# Altium PCB mix V4(3.8).PcbDoc
Units mm, origin at the board's own origin, x right, y up, seen from the top; angles counter-clockwise.
Board outline 54 x 54 mm, 2 copper layers (Top Layer, Top, Bottom Layer, Bottom); 45 components, 30 nets, 130 pads, 27 vias.
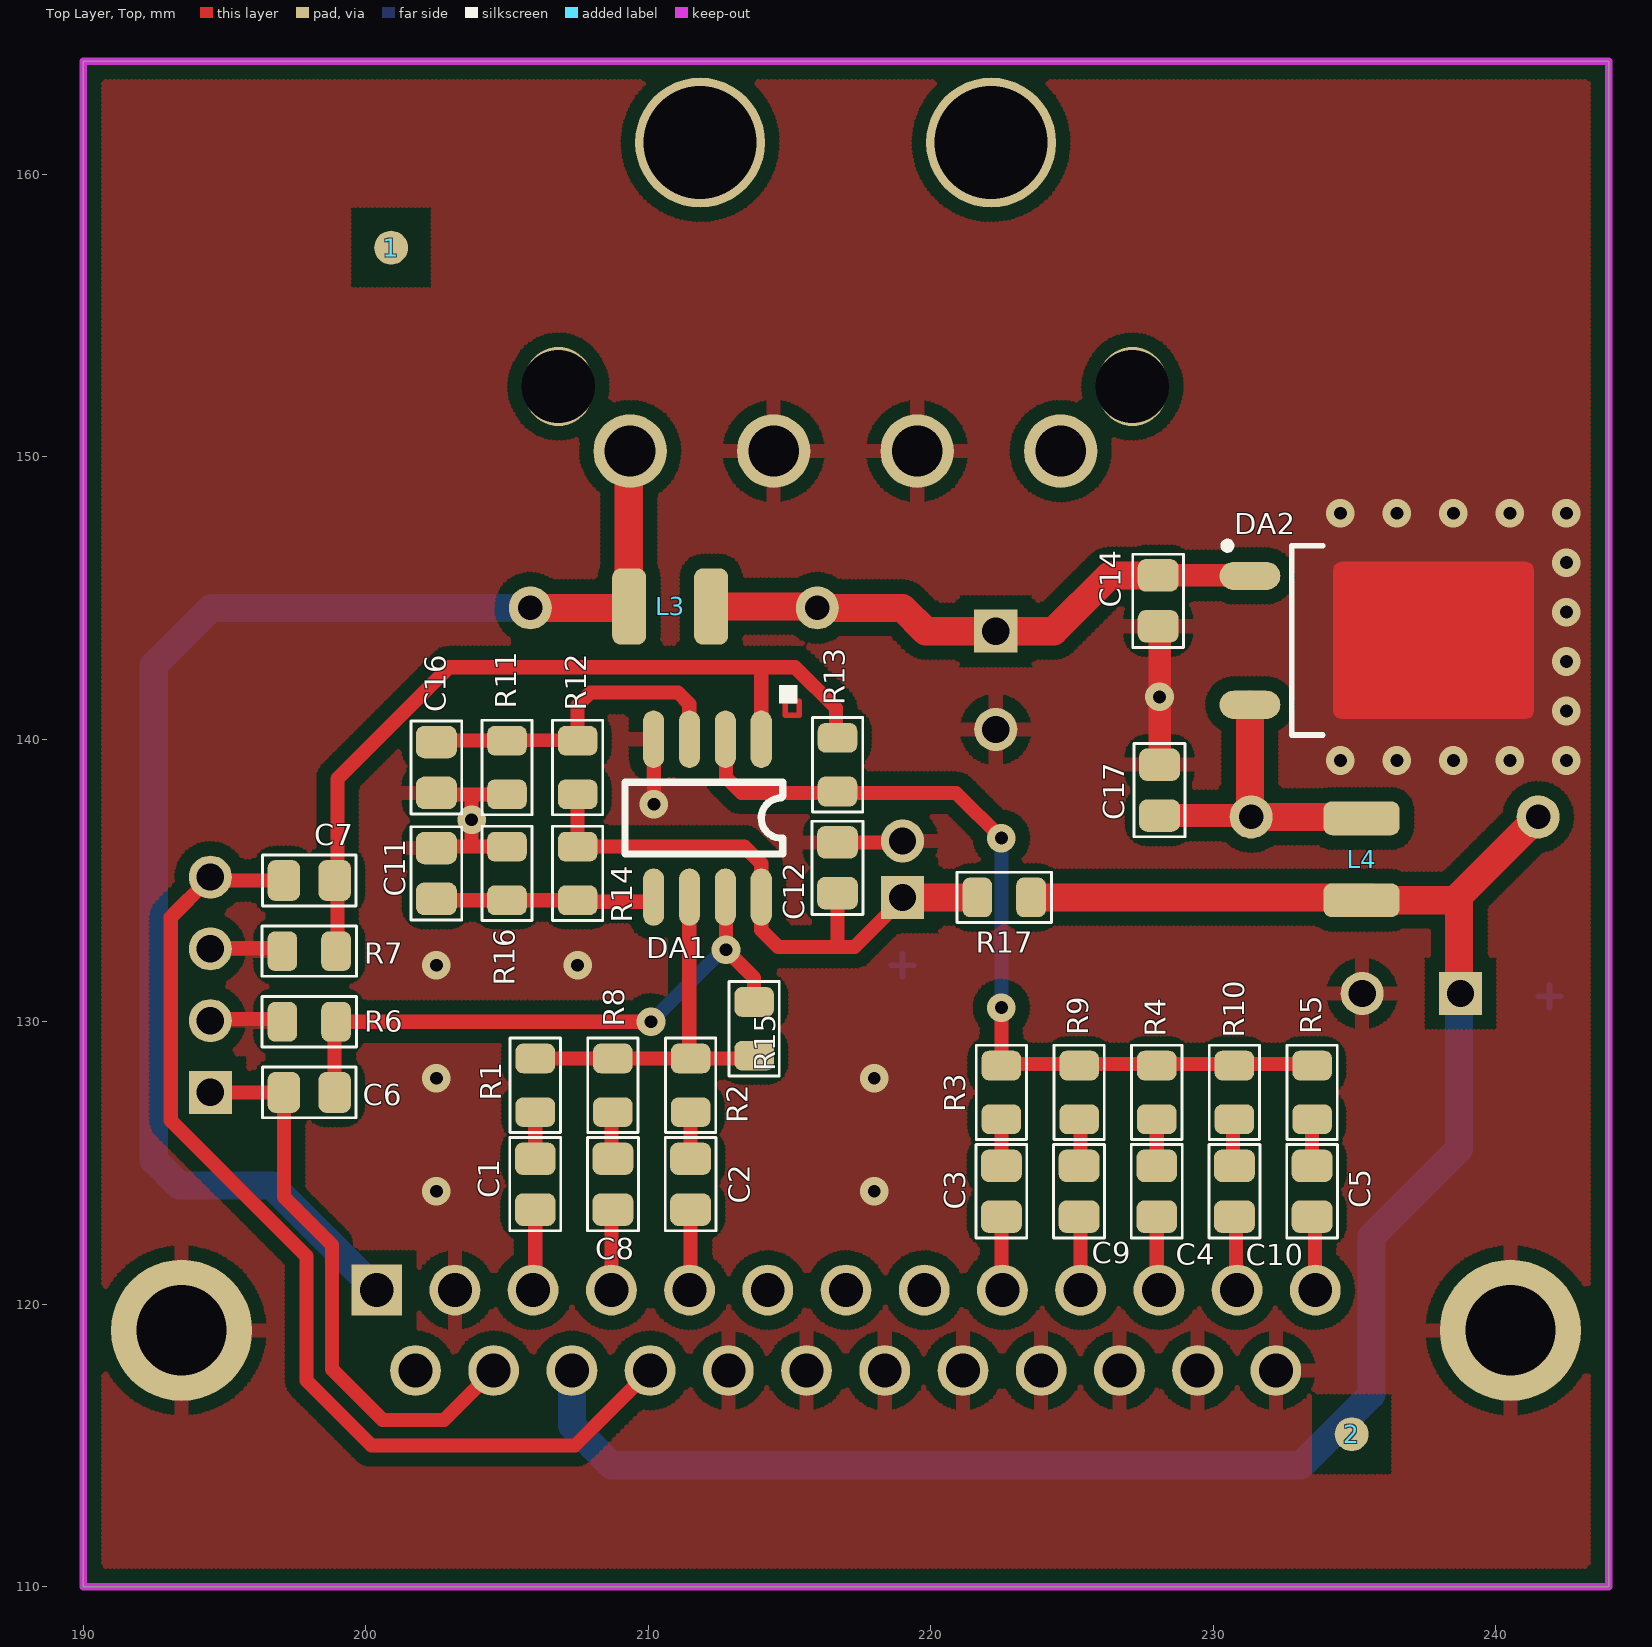
[diagram p0: Top Layer, Top view]
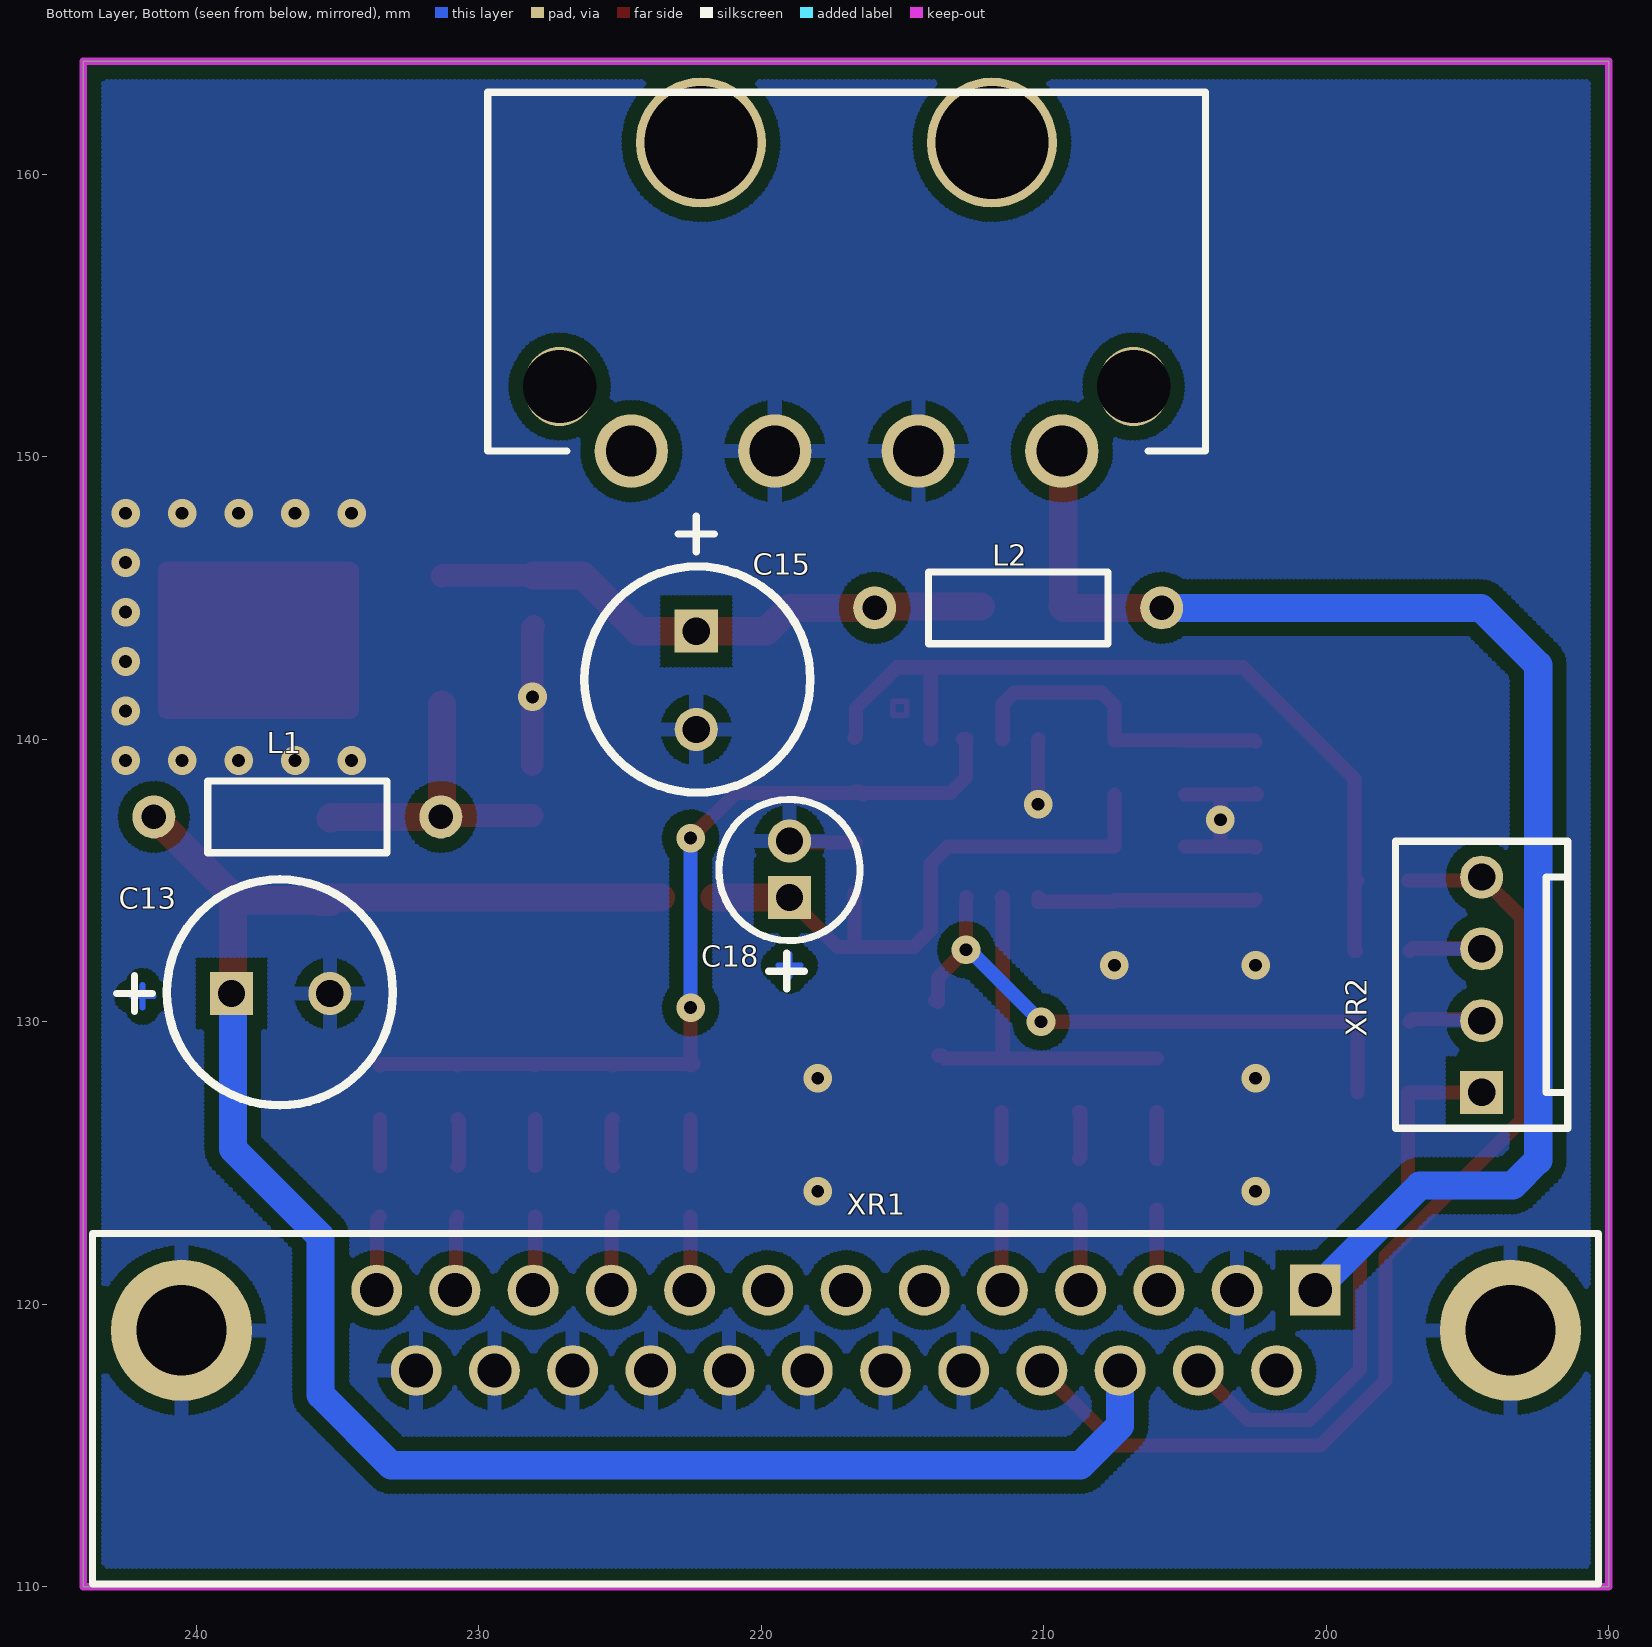
[diagram p1: Bottom Layer, Bottom view, seen from below]

## Layer stack, top to bottom
Top Solder, Top Mask: solder mask 0.0102, Solder Resist, Dk 3.5
Top Layer, Top: signal copper 0.0356
Dielectric 1: dielectric 0.32, FR-4, Dk 4.8
Bottom Layer, Bottom: signal copper 0.0356
Bottom Solder, Bot Mask: solder mask 0.0102, Solder Resist, Dk 3.5

## Board outline
190,110 244,110 244,164 190,164

## Design rules (kind name [scope] priority, off if disabled: settings)
Clearance [All] p1: gap=0.5
PlaneClearance [All] p1: clearance=0.254
PolygonConnect PolygonConnect_1 [IsVia] p1: connectstyle=Direct reliefconductorwidth=0.254 reliefentries=4 polygonreliefangle="90 Angle" airgapwidth=0.254
PolygonConnect [All] p2: connectstyle=Relief reliefconductorwidth=0.5 reliefentries=4 polygonreliefangle="90 Angle" airgapwidth=0.5
RoutingVias [All] p1: holewidth=0.711 width=1.27 viastyle="Through Hole" minholewidth=0.711 minwidth=1.27 maxholewidth=0.711 maxwidth=1.27
SolderMaskExpansion [All] p1: expansion=0.102
Width [All] p1: maxlimit=3 minlimit=0.2 preferedwidth=0.5
29 further rules are at their usual default settings.

## Components (designator, comment, footprint, x,y, rotation, side; value= is the part's Value field where it differs from the comment)
1 "{Value}" REPER1.2 200.9,157.4 r0 top
2 "{Value}" REPER1.2 234.9,115.4 r0 top
C1 "0.1uF" CC0805_2 206,124.25 r90 top
C2 "0.1uF" CC0805_2 211.5,124.25 r90 top
C3 "0.1uF" CC0805_2 222.5,124 r90 top
C4 "0.1uF" CC0805_2 228,124 r90 top
C5 "0.1uF" CC0805_2 233.5,124 r90 top
C6 "0.1uF" CC0805_2 198,127.5 r0 top
C7 "0.1uF" CC0805_2 198,135 r0 top
C8 "0.1uF" CC0805_2 208.75,124.25 r90 top
C9 "0.1uF" CC0805_2 225.25,124 r90 top
C10 "0.1uF" CC0805_2 230.75,124 r90 top
C11 "1uF" CC0805_2 202.5,135.25 r270 top
C12 "0.1uF" CC0805_2 216.7,135.45 r270 top
C13 "220uFx16V" CC8X11 238.75,131 r180 bottom
C14 "0.1uF" CC0805_2 228.05,144.9 r90 top
C15 "470uFx25V" CC8X11 222.3,143.825 r270 bottom
C16 "1uF" CC0805_2 202.5,139 r90 top
C17 "0.1uF" CC0805_2 228.1,138.2 r270 top
C18 "10uFx16V" CC4X8 219,134.4 r90 bottom
DA1 "" SO-8 214,140 r270 top
DA2 "" D-PAK(TO-252AA) 235.8,143.5 r0 top
L1 "10uH" IND400 241.5,137.25 r180 bottom
L2 "10uH" IND400 205.825,144.65 r0 bottom
L3 "10 uH" L1210_ISO 210.775,144.7 r180 top
L4 "10 uH" L1210_ISO 235.25,135.75 r90 top
R1 "12k" RC0805_2_R0805(RESC2012X70N) 206,127.75 r270 top
R2 "12k" RC0805_2_R0805(RESC2012X70N) 211.5,127.75 r270 top
R3 "12k" RC0805_2_R0805(RESC2012X70N) 222.5,127.5 r270 top
R4 "12k" RC0805_2_R0805(RESC2012X70N) 228,127.5 r270 top
R5 "12k" RC0805_2_R0805(RESC2012X70N) 233.5,127.5 r270 top
R6 "2k7" RC0805_2_R0805(RESC2012X70N) 198,130 r0 top
R7 "2k7" RC0805_2_R0805(RESC2012X70N) 198,132.5 r0 top
R8 "12k" RC0805_2_R0805(RESC2012X70N) 208.75,127.75 r270 top
R9 "12k" RC0805_2_R0805(RESC2012X70N) 225.25,127.5 r270 top
R10 "12k" RC0805_2_R0805(RESC2012X70N) 230.75,127.5 r270 top
R11 "12k" RC0805_2_R0805(RESC2012X70N) 205,139 r270 top
R12 "12k" RC0805_2_R0805(RESC2012X70N) 207.5,139 r90 top
R13 "12k" RC0805_2_R0805(RESC2012X70N) 216.7,139.1 r270 top
R14 "12k" RC0805_2_R0805(RESC2012X70N) 207.5,135.25 r270 top
R15 "12k" RC0805_2_R0805(RESC2012X70N) 213.75,129.75 r270 top
R16 "12k" RC0805_2_R0805(RESC2012X70N) 205,135.25 r90 top
R17 "10" RC0805_2_R0805(RESC2012X70N) 222.6,134.4 r180 top
XR1 "" DB25F 200.388,120.5 r0 bottom
XR2 "" PIN4W 194.5,127.5 r90 bottom

## Footprints (in the part's own frame and the unit in brackets; to place one, negate y for a bottom-side part, rotate by r counter-clockwise, add the part's x,y. Pads: shape width x height; smd on the part's side, far side on the other; paste and mask are expansions set on the pad)
CC4X8 [mil]
  rect 60x60 hole 38: 1(0,0)
  round 60 hole 38: 2(78.74,0)
  silkscreen extent -128,-98 137,98
CC8X11 [mil]
  rect 60x60 hole 38: 1(0,0)
  round 60 hole 38: 2(137,0)
  silkscreen extent -160,-156 225,159
CC0805_2 [mm]
  rrect50% 1.15x1.45 smd: 1(-0.9,0) 2(0.9,0)
  silkscreen extent -1.65,-0.9 1.65,0.9
D-PAK(TO-252AA) [mm]
  oval 2.15x1 smd: 1(-4.5,2.28) 3(-4.5,-2.28)
  round 0 smd paste-25.4 mask-25.4: 2(2,0)
  Top Layer, Top region: -1.55,-2.5 -1.513,-2.638 -1.412,-2.738 -1.275,-2.775 5.275,-2.775 5.413,-2.738 5.513,-2.638 5.55,-2.5 5.55,2.5 5.513,2.638 5.413,2.738 5.275,2.775 -1.275,2.775 -1.412,2.738 -1.513,2.638 -1.55,2.5
  silkscreen extent -5.42,-3.35 -1.92,3.47
DB25F [mm]
  rect 1.8x1.8 hole 1.2: 1(0,0)
  round 1.8 hole 1.2: 2(2.769,0) 3(5.537,0) 4(8.306,0) 5(11.074,0) 6(13.843,0) 7(16.612,0) 8(19.38,0) 9(22.149,0) 10(24.917,0) 11(27.686,0) 12(30.455,0) 13(33.223,0) 14(1.372,2.845) 15(4.14,2.845) 16(6.909,2.845) 17(9.677,2.845) 18(12.446,2.845) 19(15.215,2.845) 20(17.983,2.845) 21(20.752,2.845) 22(23.52,2.845) 23(26.289,2.845) 24(29.058,2.845) 25(31.826,2.845)
  round 5 hole 3.2: 26(40.132,1.422) 27(-6.909,1.422)
  silkscreen extent -10.02,-2 43.28,10.4
IND400 [mil]
  round 60 hole 34: 1(0,0) 2(400,0)
  silkscreen extent 75,-50 325,50
L1210_ISO [mm]
  rrect50% 1.2x2.7 smd: 1(-1.45,0) 2(1.45,0)
PIN4W [mil]
  rect 60x60 hole 38: 1(0,0)
  round 60 hole 38: 2(100,0) 3(200,0) 4(300,0)
  silkscreen extent -50,-120 350,120
RC0805_2_R0805(RESC2012X70N) [mm]
  rrect50% 1.05x1.4 smd: 1(0.95,0) 2(-0.95,0)
  silkscreen extent -1.67,-0.89 1.67,0.89
REPER1.2 [mm]
  round 1.2 smd paste-25.4 mask-25.4: 1(0,0)
SO-8 [mil]
  oval 80x29.53 smd: 1(0,0) 2(0,-50) 3(0,-100) 4(0,-150) 5(220,-150) 6(220,-100) 7(220,-50) 8(220,0)
  silkscreen extent -75,-190 160,50

## Free pads (board coordinates)
  round 2.6 hole 1.8: 1(209.36,150.2) 2(214.44,150.2) 3(219.52,150.2) 4(224.6,150.2)
  round 4.6 hole 4 unplated: 5(222.135,161.12) 6(211.835,161.12)
  oval 2.4x2.8 hole 2.6 unplated: 7(206.82,152.486) 8(227.14,152.486)

## Via types
v1: diameter 1.016, hole 0.457, Top Layer, Top to Bottom Layer, Bottom, 27 vias

## Nets (pads, with @x,y where several pads share a name; then routed paths per layer and width w, separated by ;. In a path a pad name is that pad's centre, name@x,y a point inside that pad or via, vN(x,y) a via of type N, cw(c..) or ccw(c..) an arc to the next point about the centre after c; other vN are vias at no path point)
GND: C11.1 C12.1 C13.2 C14.1 C15.2 C16.1 C17.1 C18.2 DA1.4 DA2.2 pad.2 pad.3 R6.2 R7.2 R11.1 R16.1 XR1.2 XR1.18 XR1.19 XR1.20 XR1.21 XR1.22 XR1.23 XR1.24 XR1.25 XR1.26 XR1.27 XR2.2 XR2.3 | length 21.9
  Top Layer, Top w0.5: XR2.2 194.5,130.1 196.95,130.1 R6.2 ; XR2.3 194.5,132.6 196.95,132.6 R7.2 ; C11.1 202.5,136.2 203.75,136.2 ; C16.1 202.45,138.05 202.55,138.05 203.7,138.05 ; R16.1 203.75,136.2 ; R11.1 203.7,138.05 ; DA1.4 210.2,139.99 v1(210.2,137.7) ; C12.1@216.65,136.35 C12.1 C18.2@219,136.35 ; 203.7,138.05 203.75,138 v1(203.75,137.15) 203.75,136.2
  Top Layer, Top w0.8: C18.2@219,136.35 C18.2 ; C14.1 228.1,143.95 v1(228.1,141.5) C17.1
  other v1: 202.5,124 218,124 202.5,128 218,128 202.5,132 207.5,132 234.5,139.25 236.5,139.25 238.5,139.25 240.5,139.25 242.5,139.25 242.5,141 242.5,142.75 242.5,144.5 242.5,146.25 234.5,148 236.5,148 238.5,148 240.5,148 242.5,148
NET00000: C1.2 R1.1 | length 1.6
  Top Layer, Top w0.5: C1.2 R1.1
NET00001: C1.1 XR1.3 | length 2.9
  Top Layer, Top w0.5: XR1.3 206,120.574 C1.1
NET00002: C2.2 R2.1 | length 1.6
  Top Layer, Top w0.5: C2.2 R2.1
NET00003: C3.2 R3.1 | length 1.7
  Top Layer, Top w0.5: C3.2 R3.1
NET00004: C4.2 R4.1 | length 1.7
  Top Layer, Top w0.5: C4.2 R4.1
NET00005: C5.2 R5.1 | length 1.7
  Top Layer, Top w0.5: C5.2 R5.1
NET00006: C16.2 DA1.3 R11.2 R12.1 | length 11.8
  Top Layer, Top w0.5: C16.2 202.55,139.95 R11.2 R12.1@207.5,139.969 ; R12.1 R12.1@207.5,139.969 ; DA1.3 211.45,140 211.45,141.25 211.05,141.65 207.95,141.65 207.5,141.2 R12.1@207.5,139.969
NET00007: C17.2 DA2.3 L1.2 L4.2 | length 11.3
  Top Layer, Top w0.8: C17.2 231.3,137.3 L1.2
  Top Layer, Top w1: L1.2@231.25,137.25 L1.2 ; DA2.3 231.3,137.3 231.3,137.29 L1.2 ; L4.2 235.2,137.25 L1.2
NET00008: C8.2 R8.1 | length 1.7
  Top Layer, Top w0.5: C8.2 208.7,125.2 208.7,126.8 R8.1
NET00009: C9.2 R9.1 | length 1.7
  Top Layer, Top w0.5: C9.2 225.3,124.95 225.3,126.5 R9.1
NET00010: C10.2 R10.1 | length 1.7
  Top Layer, Top w0.5: C10.2 230.7,124.95 230.7,126.5 R10.1
NET00011: C9.1 XR1.10 | length 2.6
  Top Layer, Top w0.5: C9.1 225.3,123 225.3,120.506 XR1.10
NET00012: C10.1 XR1.12 | length 2.6
  Top Layer, Top w0.5: C10.1 230.8,123 230.8,120.543 XR1.12
NET00013: C8.1 XR1.4 | length 2.9
  Top Layer, Top w0.5: XR1.4 208.7,120.506 208.7,123.2 C8.1
NET00014: C2.1 XR1.5 | length 2.9
  Top Layer, Top w0.5: XR1.5 211.5,120.537 C2.1
NET00015: C13.1 L1.1 L4.1 R17.2 XR1.16 | length 71.5
  Top Layer, Top w1: R17.2 235.3,134.4 L4.1@235.622,134.4 ; C13.1 238.7,131 238.8,131.1 238.7,131.2 238.7,134.3 ; L1.1 238.7,134.45 238.7,134.3 ; L4.1@235.4,134.25 L4.1@235.45,134.3 ; L4.1@235.4,134.25 235.25,134.25 L4.1 L4.1@235.45,134.3 ; L4.1@235.4,134.25 L4.1@235.572,134.25 ; L4.1@235.45,134.3 L4.1@235.522,134.3 ; L4.1@235.522,134.3 235.7,134.3 235.654,134.254 235.65,134.25 L4.1@235.572,134.25 ; L4.1@235.522,134.3 L4.1@235.572,134.25 ; L4.1@235.522,134.3 L4.1@235.622,134.4 ; L4.1@235.622,134.4 235.722,134.3 236.1,134.3 238.7,134.3
  Bottom Layer, Bottom w1: XR1.16 207.3,117.652 207.3,115.7 208.7,114.3 233.1,114.3 235.6,116.8 235.6,122.4 238.7,125.5 C13.1@238.7,131.05 ; C13.1@238.7,131.1 C13.1@238.7,131.05 ; C13.1 C13.1@238.7,131.05
NET00017: C3.1 XR1.9 | length 2.6
  Top Layer, Top w0.5: C3.1 222.5,120.537 XR1.9
NET00018: C4.1 XR1.11 | length 2.6
  Top Layer, Top w0.5: C4.1 228,120.574 XR1.11
NET00019: C5.1 XR1.13 | length 2.6
  Top Layer, Top w0.5: C5.1 233.6,123 233.6,120.512 XR1.13
NET00020: L2.1 L3.2 pad.1 XR1.1 | length 50.5
  Top Layer, Top w1: L2.1 209.275,144.65 L3.2 209.31,144.715 pad.1@209.31,150.2
  Bottom Layer, Bottom w1: XR1.1 196.688,124.2 193.4,124.2 192.5,125.1 192.5,142.625 194.525,144.65 L2.1
NET00021: DA1.2 R3.2 R4.2 R5.2 R9.2 R10.2 R13.1 | length 32
  Top Layer, Top w0.5: DA1.2 212.85,140 212.75,139.9 212.75,138.65 213.3,138.1 216.35,138.1 216.4,138.05 R13.1@216.45,138.1 ; R13.1@216.4,138.1 R13.1@216.45,138.1 ; R13.1 216.5,138.15 R13.1@216.45,138.1 ; v1(222.5,130.5) R3.2@222.5,128.5 ; v1(222.5,136.5) 220.9,138.1 R13.1@216.45,138.1 ; R10.2 R10.2@230.7,128.5 ; R5.2 233.45,128.5 R10.2@230.7,128.5 ; R3.2@222.5,128.5 225.2,128.5 R9.2 225.3,128.5 227.95,128.5 R4.2 228,128.5 R10.2@230.7,128.5 ; R3.2@222.5,128.5 222.4,128.5 R3.2 R3.2@222.5,128.5
  Bottom Layer, Bottom w0.5: v1(222.5,130.5) v1(222.5,136.5)
NET00022: C7.2 DA1.1 R7.1 R13.2 | length 29.7
  Top Layer, Top w0.5: R7.1 199,132.5 199,134.9 C7.2 199,135.1 199,138.6 202.95,142.55 214,142.55 ; DA1.1 214,142.55 ; R13.2 216.65,140.1 216.65,141.1 215.2,142.55 214,142.55
NET00023: DA1.6 R1.2 R2.2 R8.2 R15.1 | length 13.6
  Top Layer, Top w0.5: R1.2 R8.2 R2.2 ; DA1.6 211.5,134.372 211.48,134.352 211.45,134.352 211.45,128.8 211.45,128.75 R2.2 ; R15.1 213.6,128.8 213.5,128.7 R2.2
NET00024: C6.2 DA1.7 R6.1 R15.2 | length 21.6
  Top Layer, Top w0.5: C6.2 198.9,129.95 R6.1 v1(210.1,130) ; DA1.7 212.75,134.2 v1(212.75,132.55) 212.85,132.45 213.75,131.55 R15.2 R15.2@213.85,130.75
  Bottom Layer, Bottom w0.5: v1(210.1,130) 212.55,132.45 212.65,132.55 v1(212.75,132.55)
NET00026: C14.2 C15.1 DA2.1 L2.2 L3.1 | length 20.3
  Top Layer, Top w0.8: C14.2 231.28,145.8 DA2.1
  Top Layer, Top w1: L3.1 215.935,144.7 L2.2 219,144.65 219.825,143.825 C15.1 224.35,143.825 226.325,145.8 C14.2
NET00027: C7.1 XR1.17 XR2.4 | length 40.1
  Top Layer, Top w0.5: XR1.17 207.411,115 200.2,115 197.9,117.3 197.9,121.7 193.1,126.5 193.1,133.7 194.4,135 194.4,135.1 XR2.4@194.5,135 ; XR2.4@194.5,135 XR2.4 194.6,135.02 XR2.4@194.58,135 ; XR2.4@194.5,135 XR2.4@194.58,135 ; XR2.4@194.58,135 C7.1 194.62,135 XR2.4@194.58,135
NET00028: C6.1 XR1.15 XR2.1 | length 20.3
  Top Layer, Top w0.5: XR2.1 C6.1 197.1,123.8 198.8,122.1 198.8,117.7 200.6,115.9 202.773,115.9 XR1.15
NET00030: C11.2 DA1.5 R14.1 R16.2 | length 7.9
  Top Layer, Top w0.5: C11.2 202.55,134.3 R16.2 R14.1 207.55,134.25 210.2,134.25 DA1.5
VCC: C12.2 C18.1 DA1.8 R12.2 R14.2 R17.1 | length 21.7
  Top Layer, Top w0.5: R12.2 R14.2 213.4,136.2 214,135.6 DA1.8 214,133.25 214.6,132.65 216.7,132.65 ; C12.2 216.7,132.65 ; C18.1 219,134.35 217.3,132.65 216.7,132.65
  Top Layer, Top w0.8: C18.1@218.85,134.55 C18.1
  Top Layer, Top w1: C18.1 R17.1
pads on no net: 1.1 2.1 XR1.6 XR1.7 XR1.8 XR1.14
copper on no net: | length 5.2
  Top Layer, Top w0.2: 214.85,140.85 214.85,141.35 215.35,141.35 215.35,140.85 214.85,140.85
  Bottom Layer, Bottom w0.2: 218.6,132 219.4,132 ; 219,131.6 219,132.4 ; 241.5,130.9 242.3,130.9 ; 241.9,130.5 241.9,131.3

## Polygon pours and split planes (outlines as drawn)
GND on Top Layer, Top "TOP" (hatched 90Degree grid 0.15 track 0.2, remove dead copper, pour order 6): 190,164 244,164 244,110 190,110
GND on Bottom Layer, Bottom "BOT" (hatched 90Degree grid 0.15 track 0.2, remove dead copper, pour order 8): 190,164 244,164 244,110 190,110

## Keep-outs
Keep-Out Layer, Board:
  lines w0.127: 190,110 244,110 244,164 190,164 190,110
  lines w0.254: 190,110 190,164 244,164 244,110 190,110

## Other copper
Top Layer, Top:
  pour cut-out: 233.4,113.95 233.45,113.9 236.35,113.9 236.4,113.95 236.4,116.85 236.35,116.9 233.45,116.9 233.4,116.85
  pour cut-out: 199.4,155.95 199.45,155.9 202.35,155.9 202.4,155.95 202.4,158.85 202.35,158.9 199.45,158.9 199.4,158.85

## Silkscreen, mask and mechanical layers (free items; w line width, h text height)
Bottom Overlay, Bot Silk:
  lines w0.254: 206.312,150.2 204.28,150.2 204.28,162.9 229.68,162.9 229.68,150.2 226.886,150.2

## Dimensions
190,164 to 244,110 on Mechanical 1, Top Assy
190,110 to 244,164 on Mechanical 1, Top Assy